# EAGLE board ELE-T202 (EAGLE 4.16)
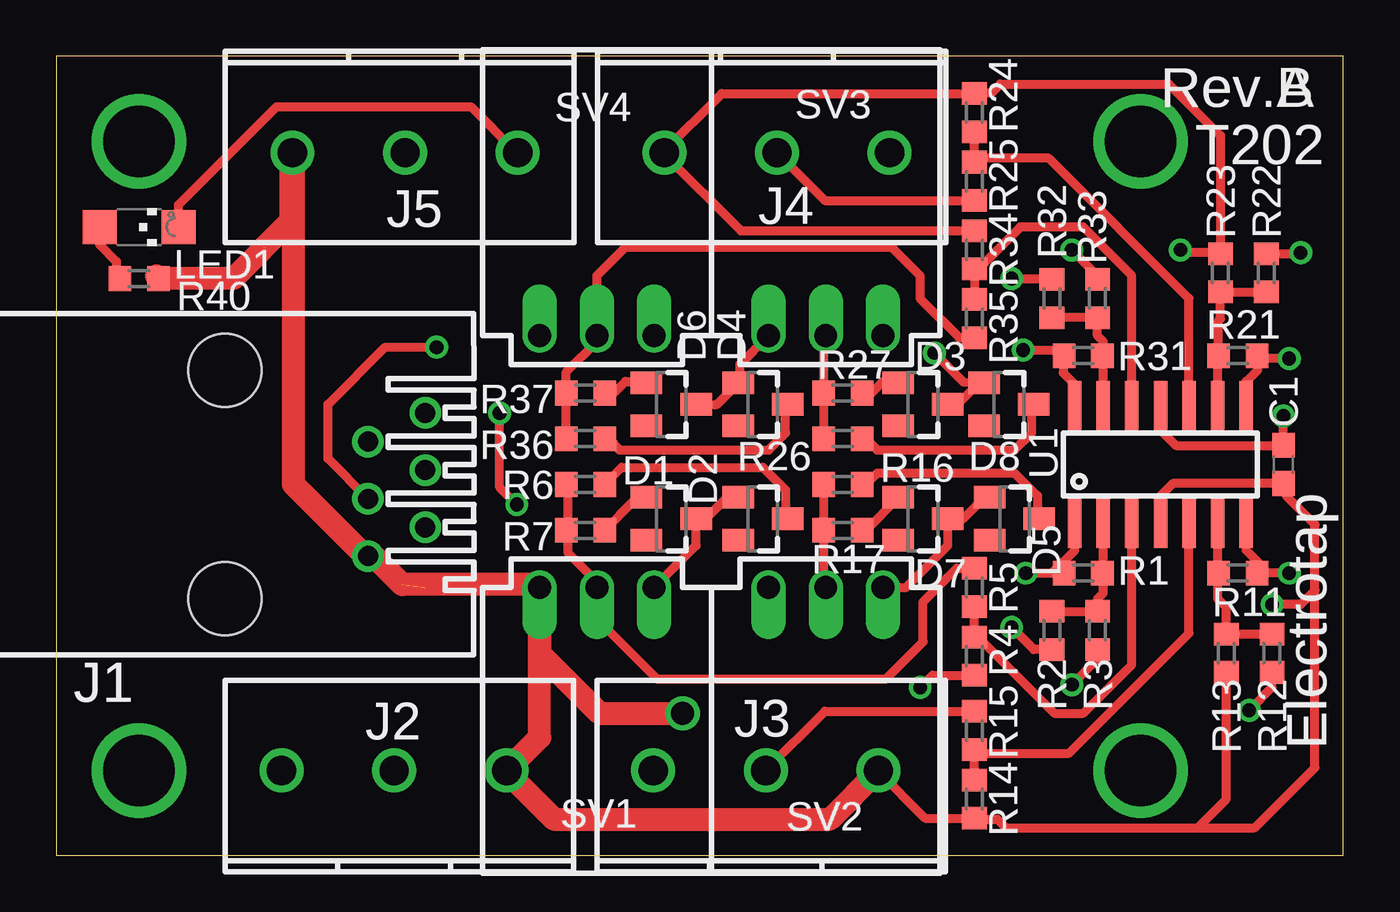
[diagram p0: board, top side]
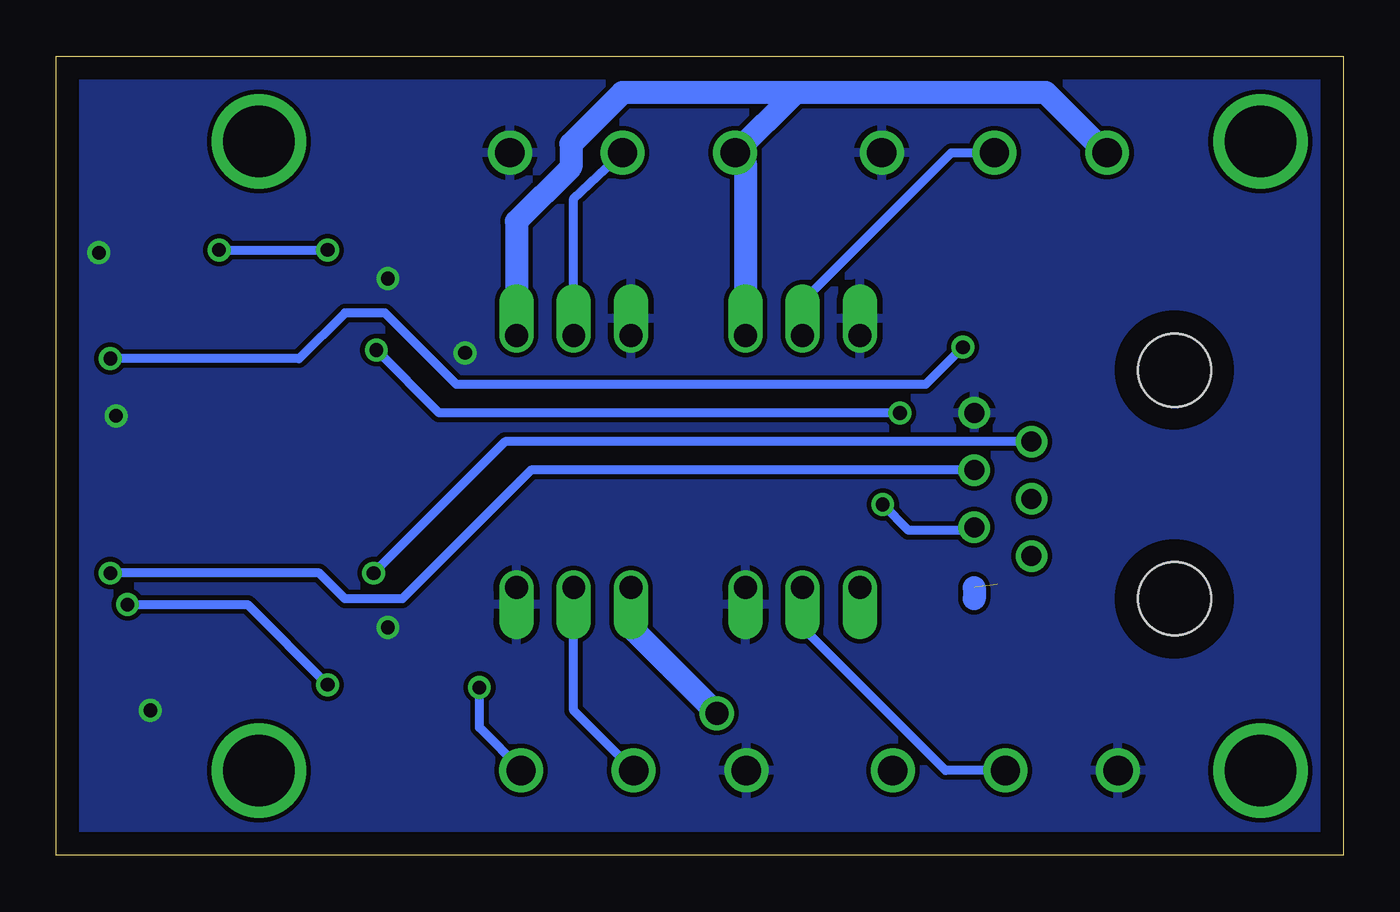
[diagram p1: board, bottom side, seen from below]

Size 57.13 x 35.48 mm. Coordinates in mm from the lower left corner, seen from the top.
Outline: 0,0 57.13,0 57.13,35.48 0,35.48 0,0
Copper layers (1*16): Top 0.035mm / dielectric 1.5mm / Bottom 0.035mm
Design rules "default": minimum track width 10mil, minimum drill 24mil, track to track 8mil, track to pad 8mil, pad to pad 8mil, via to via 8mil, smd to smd 8mil, copper to edge 40mil, drill to drill 8mil, minimum pad ring 10mil, minimum via ring 8mil, stop-mask expansion 4mil, vias tented up to drill 0mil, thermal gap 10mil

## Footprints (pad centres in the part's own frame; a part is rotated, then mirrored left to right if it is on the bottom)
C0603 = smd 1.1 x 1: 1 -0.85,0; 2 0.85,0
SOT23 = smd 1 x 1.4: 1 -0.95,-1.1; 2 0.95,-1.1; 3 0,1.1
TELEPHONE_JACK = drill 0.889 round: 1 -3.175,8.89; 2 -1.905,6.35; 3 -0.635,8.89; 4 0.635,6.35; 5 1.905,8.89; 6 3.175,6.35 | hole 3.251: -5.08,0; 5.08,0
TERMINAL_BLOCK_3 = drill 1.3 round: P$1 2.5,0; P$2 7.5,0; P$3 12.5,0
CHIPLED_1206 = smd 1.5 x 1.5: A 0,-1.75; C 0,1.75
R0603 = smd 1 x 1.1: 1 -0.85,0; 2 0.85,0
JACK_MOLEX_3PIN_RA = drill 1.016 offset: 5V 0,0; GND 0,5.08; SENSOR 0,2.54
SO14 = smd 0.6 x 2.2: 1 -3.81,-2.6; 2 -2.54,-2.6; 3 -1.27,-2.6; 4 0,-2.6; 5 1.27,-2.6; 6 2.54,-2.6; 7 3.81,-2.6; 8 3.81,2.6; 9 2.54,2.6; 10 1.27,2.6; 11 0,2.6; 12 -1.27,2.6; 13 -2.54,2.6; 14 -3.81,2.6

## Placement (x,y rotation side)
C1  .1uF  [C0603]  54.48,17.36 90 top
D1  1N4148SOT23  [SOT23]  27.3,14.95 270 top
D2  1N4148SOT23  [SOT23]  31.36,14.95 270 top
D3  1N4148SOT23  [SOT23]  38.48,20.03 270 top
D4  1N4148SOT23  [SOT23]  31.36,20.03 270 top
D5  1N4148SOT23  [SOT23]  42.29,20.03 270 top
D6  1N4148SOT23  [SOT23]  27.3,20.03 270 top
D7  1N4148SOT23  [SOT23]  38.48,14.95 270 top
D8  1N4148SOT23  [SOT23]  42.54,14.95 270 top
J1  [TELEPHONE_JACK]  7.49,16.47 270 top
J2  [TERMINAL_BLOCK_3]  7.5,3.77 0 top
J3  [TERMINAL_BLOCK_3]  24,3.77 0 top
J4  [TERMINAL_BLOCK_3]  39.49,31.2 180 top
J5  [TERMINAL_BLOCK_3]  22.98,31.2 180 top
LED1  [CHIPLED_1206]  3.68,27.9 270 top
R1  100K  [R0603]  45.59,12.54 0 top
R2  10K  [R0603]  44.19,9.99 90 top
R3  np  [R0603]  46.22,9.99 90 top
R4  10K  [R0603]  40.76,8.85 270 top
R5  10K  [R0603]  40.76,11.9 270 top
R6  1K  [R0603]  23.49,16.47 180 top
R7  1K  [R0603]  23.49,14.44 180 top
R11  4.7K  [R0603]  52.45,12.54 0 top
R12  470K  [R0603]  53.97,8.98 90 top
R13  np  [R0603]  51.94,8.98 90 top
R14  10K  [R0603]  40.76,2.5 270 top
R15  10K  [R0603]  40.76,5.55 270 top
R16  1K  [R0603]  34.92,16.47 180 top
R17  1K  [R0603]  34.92,14.44 180 top
R21  4.7K  [R0603]  52.45,22.19 0 top
R22  470K  [R0603]  53.72,25.87 270 top
R23  np  [R0603]  51.68,25.87 270 top
R24  10K  [R0603]  40.76,32.98 90 top
R25  10K  [R0603]  40.76,29.93 90 top
R26  1K  [R0603]  34.92,18.5 180 top
R27  1K  [R0603]  34.92,20.54 180 top
R31  4.7K  [R0603]  45.59,22.19 180 top
R32  470K  [R0603]  44.19,24.73 270 top
R33  np  [R0603]  46.22,24.73 270 top
R34  10K  [R0603]  40.76,26.89 90 top
R35  10K  [R0603]  40.76,23.84 90 top
R36  1K  [R0603]  23.49,18.5 180 top
R37  1K  [R0603]  23.49,20.54 180 top
R40  1K  [R0603]  3.68,25.62 0 top
SV1  JACK_MOLEX_3PINRA_MALE  [JACK_MOLEX_3PIN_RA]  21.46,11.9 270 top
SV2  JACK_MOLEX_3PINRA_MALE  [JACK_MOLEX_3PIN_RA]  31.62,11.9 270 top
SV3  JACK_MOLEX_3PINRA_MALE  [JACK_MOLEX_3PIN_RA]  36.7,23.08 90 top
SV4  JACK_MOLEX_3PINRA_MALE  [JACK_MOLEX_3PIN_RA]  26.54,23.08 90 top
U1  OPAMP-AD8608  [SO14]  49.02,17.36 0 top

## Library data of the parts
C1 J1 SV1-SV4 U1 = TEABOX-LIB
D1-D8 = diode
J2-J5 = SENSORPARTS
LED1 = led
R1-R7 R11-R17 R21-R27 R31-R37 R40 = rcl

## Nets
+5V: C1.1 J1.6 J2.P$3 J3.P$3 J4.P$3 J5.P$3 R3.1 R4.2 R13.1 R14.2 R23.1 R24.2 R33.1 R34.2 R40.2 SV1.5V SV2.5V SV3.5V SV4.5V U1.4
GND: C1.2 D1.3 D2.1 D3.3 D4.1 D5.1 D6.3 D7.3 D8.1 J1.1 J2.P$1 J3.P$1 J4.P$1 J5.P$1 LED1.C R2.1 R12.1 R22.1 R32.1 SV1.GND SV2.GND SV3.GND SV4.GND U1.11
N$1: J2.P$2 R5.1 R6.2 R7.2 SV1.SENSOR
N$2: R14.1 R15.2 U1.5
N$3: R4.1 R5.2 U1.3
N$4: R1.2 R2.2 R3.2 U1.2
N$5: J1.2 R1.1 U1.1
N$6: J3.P$2 R15.1 R16.2 R17.2 SV2.SENSOR
N$7: R11.1 R12.2 R13.2 U1.6
N$8: R31.1 R32.2 R33.2 U1.13
N$9: J1.3 R11.2 U1.7
N$11: R24.1 R25.2 U1.10
N$12: R21.1 R22.2 R23.2 U1.9
N$13: J1.4 R21.2 U1.8
N$14: J4.P$2 R25.1 R26.2 R27.2 SV3.SENSOR
N$16: R34.1 R35.2 U1.12
N$18: LED1.A R40.1
N$19: J1.5 R31.2 U1.14
N$20: D1.1 R7.1
N$21: D2.3 R6.1
N$22: D8.3 R16.1
N$23: D7.1 R17.1
N$24: D3.1 R27.1
N$25: D5.3 R26.1
N$26: D6.1 R37.1
N$27: D4.3 R36.1
N$28: J5.P$2 R35.1 R36.2 R37.2 SV4.SENSOR

## Tracks (layer width: path | path; a pad name or v marks a point on that pad's centre or on a via)
+5V  (via drill 0.61, 1.02)  (1 unrouted)
  Top 0.406: 10.54,31.2 J5.P$3 | 49.02,14.69 U1.4 49.02,15.96 49.56,16.51 C1.1 54.52,16.47 54.61,16.47 54.61,15.96 55.88,14.69 55.88,11.77 | J3.P$3 36.44,3.77 38.56,1.65 40.64,1.65 | 40.64,1.65 R14.2 | R4.2 38.9,8 v38.35,7.46 | R34.2 30.39,27.74 26.92,31.2 | J4.P$3 26.92,31.2 | 40.64,33.83 29.55,33.83 26.92,31.2 | 40.64,33.83 R24.2 | 40.64,33.83 40.64,33.87 41.52,33.87 41.91,34.25 49.4,34.25 51.68,31.97 R23.1 51.65,26.76 50.03,26.76 v49.91,26.89 | R13.1 51.94,2.5 50.67,1.23 | 50.67,1.23 42.16,1.23 41.78,1.61 40.64,1.61 40.64,1.65 | R33.1 46.22,25.74 v45.08,26.89 | R3.1 46.22,8.72 v45.08,7.58 | v53.97,11.14 55.24,11.14 55.88,11.77 | 55.88,11.77 55.88,3.9 53.21,1.23 50.67,1.23
  Top 1.016: J5.P$3 10.41,31.2 | 10.41,31.2 10.54,31.08 | v27.81,6.31 24.12,6.31 21.46,8.98 21.46,11.65 | 21.46,11.65 SV1.5V 21.33,12.03 15.36,12.03 14.09,13.3 J1.6 13.71,13.3 10.54,16.47 10.54,31.2 | 21.46,11.65 21.46,5.23 J2.P$3 20,3.71 22.09,1.61 34.34,1.61 J3.P$3 | 10.41,31.2 10.41,28.16 7.87,25.62 4.57,25.62 4.53,25.66 | 4.53,25.66 4.44,25.74 | 4.53,25.66 R40.2
  Bottom 0.406: J3.P$3 36.44,3.77 38.35,5.68 v38.35,7.46 | v49.91,26.89 v45.08,26.89 | v45.08,7.58 48.64,11.14 v53.97,11.14
  Bottom 1.016: 24.32,33.87 J4.P$3 26.54,30.75 SV4.5V | J5.P$3 10.54,31.2 13.2,33.87 24.32,33.87 | SV3.5V 36.7,28.16 34.29,30.57 34.29,31.59 32,33.87 24.32,33.87 | SV2.5V 31.62,10.12 v27.81,6.31 | 16.38,11.9 16.38,11.39
GND  (via drill 0.61)
  Top 0.406: SV1.GND 28.4,13.76 D1.3 28.57,14.69 29.77,15.9 D2.1 | 30.28,20.98 30.35,21.04 30.35,21.81 SV3.GND | 30.28,20.98 D4.1 | D6.3 29.33,20.03 30.28,20.98 | D8.1 41.2,15.9 40.25,14.95 D7.3 39.58,13.76 37.71,11.9 SV2.GND | D3.3 40,20.03 41.02,21.04 41.08,20.98 D5.1 40.3,21 v38.98,22.31 | LED1.C 5.43,28.89 9.77,33.24 18.41,33.24 20.44,31.2 J5.P$1 | v54.48,19.52 C1.2 49.69,18.21 49.02,18.88 U1.11 | R22.1 55.2,26.72 v55.24,26.76 | R32.1 44.19,25.62 v42.41,25.62 | R12.1 53.97,7.46 v52.95,6.44 | R2.1 43.39,9.14 v42.41,10.12
  pour Bottom: -0.13,35.52 57.02,35.52 57.02,-0.04 -0.13,-0.04
N$1
  Top 0.406: R6.2 22.73,16.38 22.73,14.44 | 22.73,14.35 R7.2 22.73,14.44 | 22.73,14.44 22.73,13.42 24,12.15 SV1.SENSOR 24,10.5 26.66,7.84 36.83,7.84 38.48,9.49 38.48,11.27 39.96,12.75 R5.1
  Bottom 0.406: J2.P$2 17.65,3.77 24,10.12 SV1.SENSOR
N$2
  Top 0.406: 40.76,3.26 R14.1 40.76,4.66 | U1.5 50.29,9.87 44.95,4.53 40.89,4.53 40.76,4.66 | 40.76,4.66 R15.2
N$3
  Top 0.406: 40.76,9.87 R5.2 | U1.3 47.75,8.47 45.59,6.31 44.32,6.31 40.76,9.87 | R4.1 40.76,9.87
N$4
  Top 0.406: 46.48,12.54 R1.2 | 46.48,12.54 U1.2 | 46.48,12.54 46.48,11.65 46.22,11.39 R3.2 | R3.2 46.22,10.76 | R2.2 44.1,10.84 | 44.1,10.84 R3.2 | 44.1,10.84 44.06,10.88
N$5  (via drill 0.61)
  Top 0.406: U1.1 45.21,13.55 44.7,13.04 | R1.1 44.7,12.54 44.7,13.04 | 44.7,13.04 44.19,12.54 v43.05,12.54
  Bottom 0.406: v43.05,12.54 37.21,18.38 J1.2
N$6
  Top 0.406: R16.2 34.16,16.47 34.07,16.38 R17.2 34.07,11.99 SV2.SENSOR | J3.P$2 34.12,6.4 R15.1
  Bottom 0.406: J3.P$2 34.16,6.43 SV2.SENSOR
N$7
  Top 0.406: 51.56,12.41 51.6,12.45 R11.1 | 51.56,12.41 U1.6 | 51.56,12.41 51.56,11.39 51.94,11.01 R13.2 53.93,9.83 53.97,9.87 R12.2
N$8
  Top 0.406: U1.13 46.48,22.19 R31.1 46.44,22.27 46.48,22.31 46.48,22.82 46.22,23.08 46.22,23.84 | 46.22,23.84 R33.2 | R32.2 46.18,23.88 46.22,23.84
N$9  (via drill 0.61)
  Top 0.406: 52.83,13.55 53.34,13.04 53.34,12.54 53.3,12.5 | 53.3,12.5 53.21,12.41 | 53.3,12.5 R11.2 | 52.83,13.55 U1.7 | 52.83,13.55 53.59,12.79 53.59,12.54 v54.73,12.54
  Bottom 0.406: v54.73,12.54 45.46,12.54 44.32,11.39 41.78,11.39 36.06,17.11 J1.3
N$10  (via drill 3.17)
  other vias: 3.68,3.77
N$11
  Top 0.406: 40.76,30.95 R24.1 | 40.76,30.95 R25.2 | U1.10 50.29,24.73 44.06,30.95 40.76,30.95
N$12
  Top 0.406: U1.9 51.56,22.19 R21.1 51.6,23.75 51.68,23.84 R23.2 53.68,25.02 53.72,24.98 R22.2
N$13  (via drill 0.61)
  Top 0.406: R21.2 53.21,22.19 53.34,22.06 | U1.8 52.83,21.04 53.34,21.55 53.34,22.06 | v54.73,22.06 53.34,22.06 | v16.89,22.57 14.6,22.57 12.06,20.03 12.06,17.61 J1.4
  Bottom 0.406: v54.73,22.06 46.35,22.06 44.32,24.09 42.54,24.09 39.37,20.92 18.54,20.92 v16.89,22.57
N$14
  Top 0.406: SV3.SENSOR 34.07,22.99 R27.2 34.16,20.54 34.07,20.45 R26.2 | J4.P$2 34.12,29.08 R25.1
  Bottom 0.406: J4.P$2 34.16,29.16 SV3.SENSOR
N$15  (via drill 3.17)
  other vias: 48.13,31.71
N$16
  Top 0.406: R35.2 R34.1 40.85,26.04 40.89,26 42.79,27.9 45.59,27.9 47.75,25.74 U1.12
N$17  (via drill 3.17)
  other vias: 48.13,3.77
N$18
  Top 0.406: LED1.A 1.93,27.11 2.66,26.38 2.66,25.62 R40.1
N$19  (via drill 0.61)
  Top 0.406: U1.14 45.21,20.92 44.7,21.43 44.7,22.19 | 44.7,22.19 R31.2 | 44.7,22.19 44.45,22.44 v42.92,22.44 | v19.68,19.65 19.68,16.34 v20.44,15.58
  Bottom 0.406: v42.92,22.44 40.13,19.65 v19.68,19.65 | J1.5 16.38,14.44 19.3,14.44 v20.44,15.58
N$20
  Top 0.406: 26.13,15.71 26.28,15.71 | 26.13,15.71 D1.1 | R7.1 25.61,15.71 26.13,15.71
N$21
  Top 0.406: R6.1 25.1,17.23 31.36,17.23 32.38,16.22 32.38,15.2 D2.3
N$22
  Top 0.406: R16.1 35.94,16.47 36.44,16.98 42.54,16.98 43.56,15.96 43.56,14.95 D8.3
N$23
  Top 0.406: 37.39,15.9 37.46,15.96 | 37.39,15.9 D7.1 | R17.1 35.94,14.44 37.39,15.9
N$24
  Top 0.406: R27.1 36.19,20.54 36.7,21.04 37.46,21.04 37.39,20.98 D3.1
N$25
  Top 0.406: R26.1 35.94,18.5 36.44,18 42.54,18 43.3,18.76 43.3,20.03 D5.3
N$26
  Top 0.406: R37.1 24.76,20.54 25.27,21.04 26.28,21.04 26.22,20.98 D6.1
N$27
  Top 0.406: R36.1 24.51,18.5 25.01,18 31.62,18 32.38,18.76 32.38,20.03 D4.3
N$28
  Top 0.406: R36.2 22.64,20.45 22.73,20.54 R37.2 22.64,21.46 24,22.82 | 24,22.82 SV4.SENSOR | R35.1 40.09,22.99 38.35,24.73 38.35,25.74 37.08,27.01 25.27,27.01 24,25.74 24,22.82
  Bottom 0.406: J5.P$2 17.39,31.2 24,24.6 SV4.SENSOR 24,22.82
N$29  (via drill 3.17)
  other vias: 3.68,31.71

## Text on the board
tPlace: Rev.A | T202 | Electrotap
_tplace: SV4 | SV3 | Rev.B | R24 | T202 | J5 | J4 | R32 | R25 | R23 | R22 | LED1 | R33 | R34 | R40 | R31 | R21 | D6 | D4 | R27 | D3 | R35 | R37 | R36 | C1 | D1 | D2 | R26 | R16 | D8 | R6 | U1 | Electrotap | R7 | D5 | R17 | R5 | D7 | R1 | R11 | R4 | R15 | J1 | R2 | R3 | J2 | J3 | R13 | R12 | R14 | SV1 | SV2